# Altium PCB Cat_v1.PcbDoc (part 1 of 2)
Units mil, origin at the board's own origin, x right, y up, seen from the top; angles counter-clockwise.
Board outline 3347.94 x 3903.41 mil, 2 copper layers (Top, Bottom), stack 61.811 mil thick; 108 components, 71 nets, 321 pads, 652 vias.
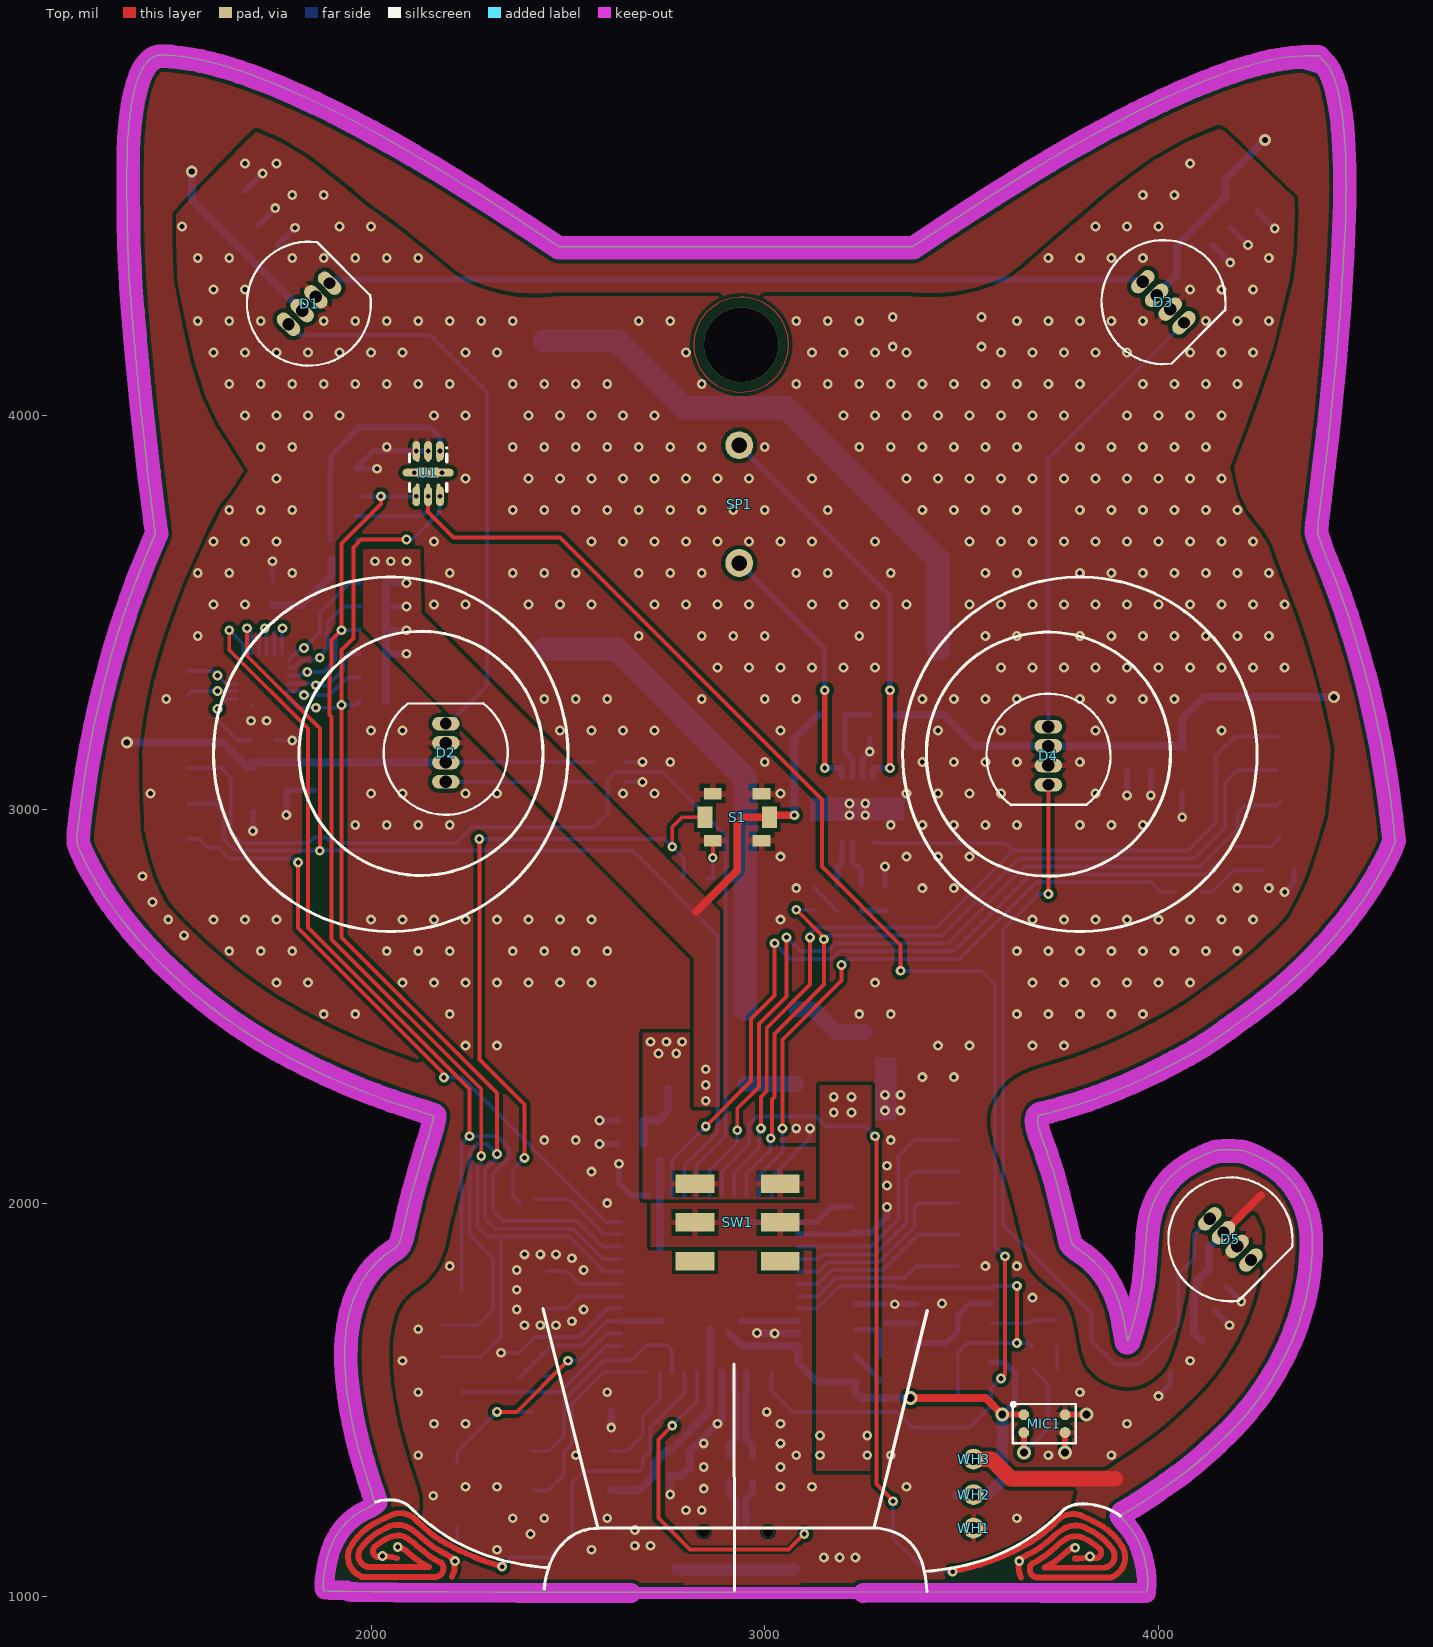
[diagram p0: Top view]
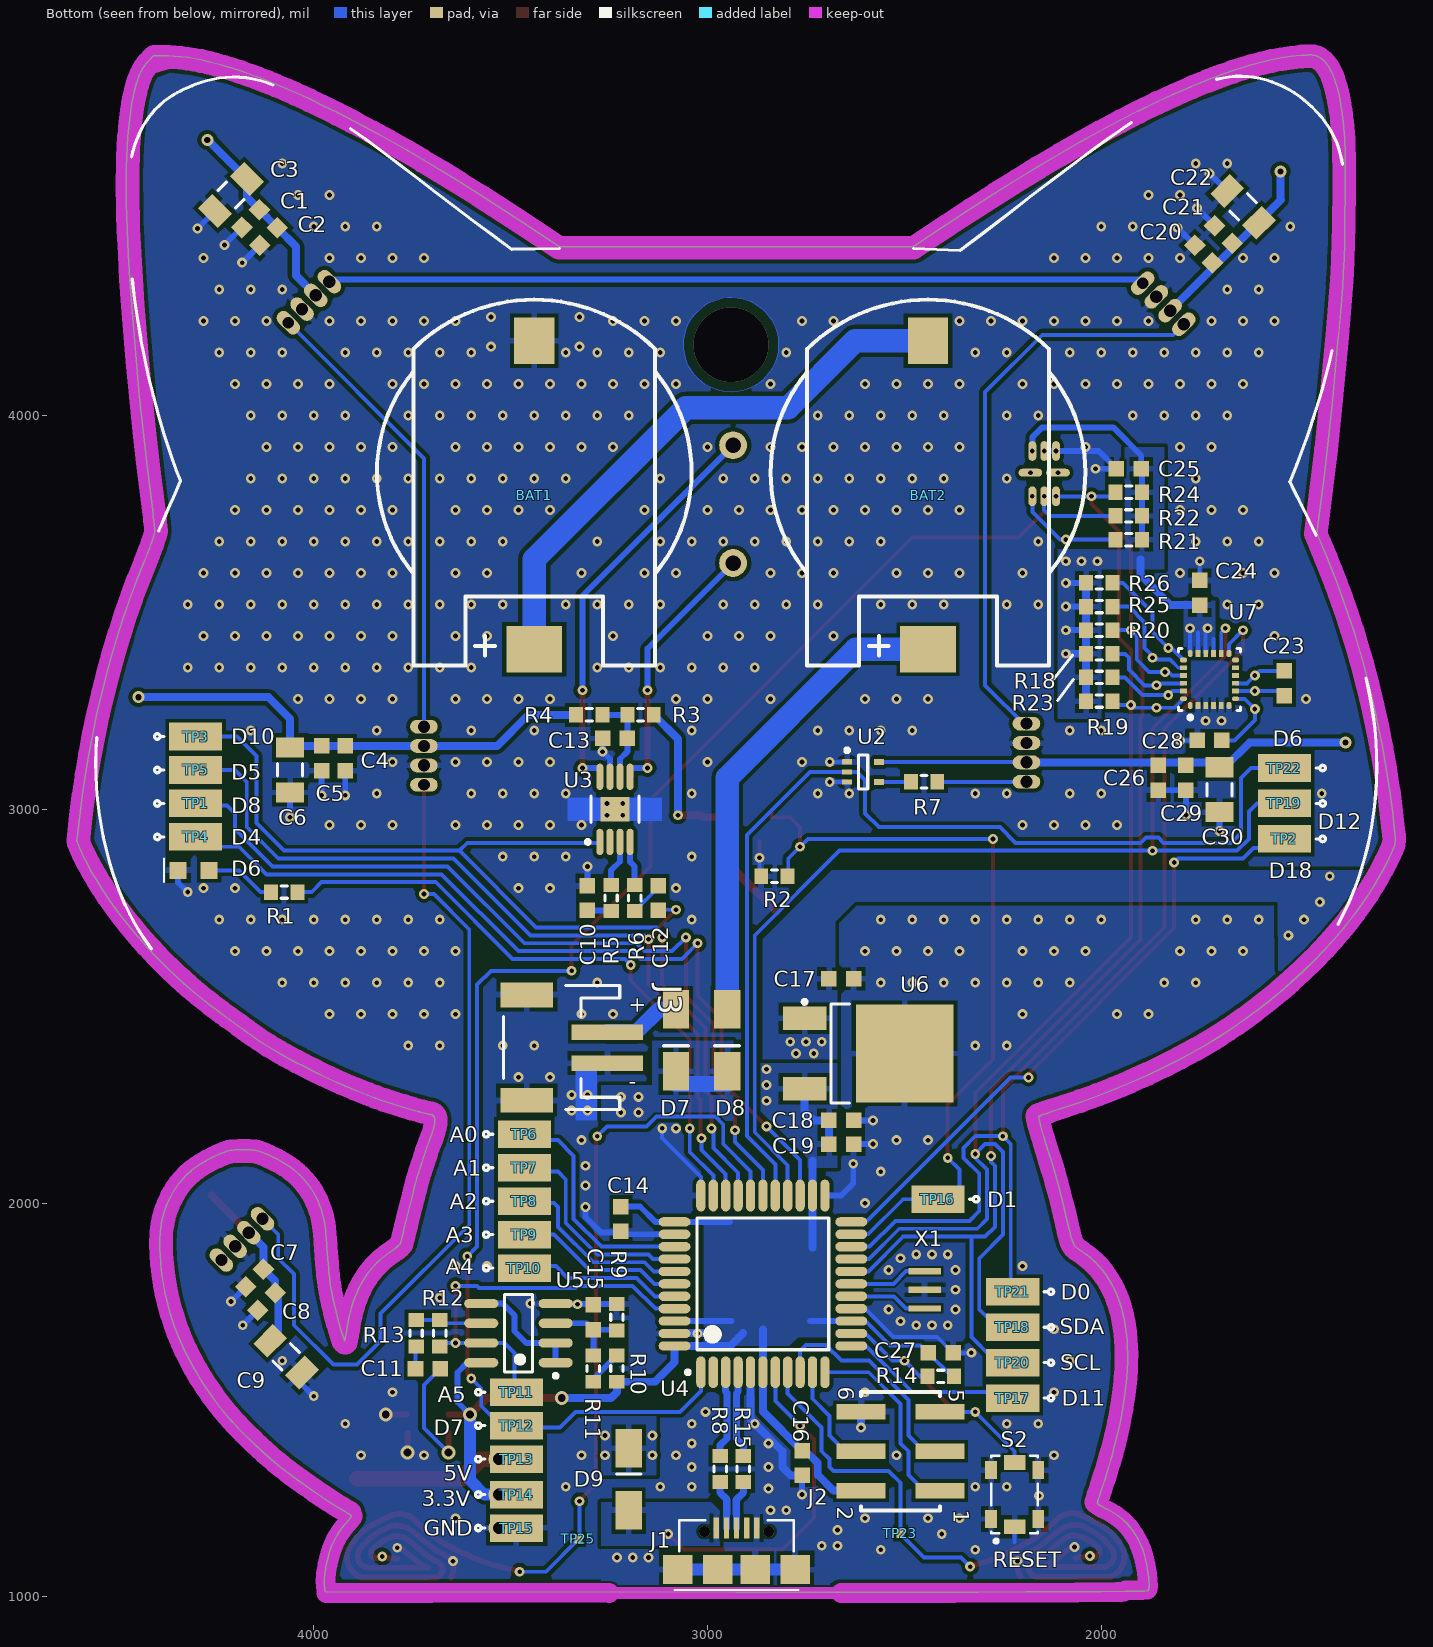
[diagram p1: Bottom view, seen from below]

## Layer stack, top to bottom
Top Solder: solder mask 0.4, Solder Resist, Dk 3.5
Top: signal copper 1.378
Dielectric 1: core 59.055, FR-4, Dk 4.8
Bottom: signal copper 1.378
Bottom Solder: solder mask 0.4, Solder Resist, Dk 3.5

## Board outline
1093 vertices, not listed, extent 1253.26,1012.32 4601.2,4915.73

## Design rules (kind name [scope] priority, off if disabled: settings)
AssemblyTestPointUsage SilkToBoardRegionClearance_1 [All] p1:
AssemblyTestPointUsage [All] p2:
AssemblyTestPointUsage SilkToBoardRegionClearance_2 [All] p3:
Clearance Clearance_Polygon [InNamedPolygon('GND_L02_P056') or InNamedPolygon('GND_L01_P034') or InNamedPolygon('VCC_L01_P036') or InNamedPolygon('VIN_L01_P010') or InNamedPolygon('VCC_L01_P014')] p1: gap=10
Clearance Clearance_Diff [InNet('D_N') vs InNet('D_P')] p2: gap=6
Clearance [All] p3: gap=6
DiffPairsRouting [InDifferentialPairClass('All Differential Pairs')] p1: maxlimit=10 minlimit=6 mostfreqgap=6 toplayer_minwidth=6 toplayer_maxwidth=20 toplayer_prefwidth=18 bottomlayer_minwidth=6 bottomlayer_maxwidth=20 bottomlayer_prefwidth=18 maxuncoupledlength=500
HoleSize [All] p1: absolutevalues=TRUE maxlimit=250 minlimit=11.81 maxpercent=80.000 minpercent=20.000
MatchedLengths DiffPair_DIFF100MatchedLengths [InDifferentialPairClass('DIFF100')] p1: tolerance=6 checknetsindiffpair=TRUE checkdiffpairvsdiffpair=FALSE checkxsignals=FALSE checkothers=FALSE
MinimumSolderMaskSliver [All] p1: minsoldermaskwidth=3.94
PolygonConnect PolygonConnect_Via [IsVia] p1: connectstyle=Direct reliefconductorwidth=10 reliefentries=4 polygonreliefangle="90 Angle" airgapwidth=10
PolygonConnect PolygonConnect_powerstuff [InNet('5V') OR InNet('3.3V') OR InNet('GND') OR InNet('VCC') OR InNet('VIN')] p2: connectstyle=Relief reliefconductorwidth=15 reliefentries=4 polygonreliefangle="90 Angle" airgapwidth=10
PolygonConnect [All] p3: connectstyle=Direct reliefconductorwidth=10 reliefentries=4 polygonreliefangle="90 Angle" airgapwidth=10
RoutingVias [All] p1: holewidth=12 width=25 viastyle="Through Hole" minholewidth=12 minwidth=25 maxholewidth=28 maxwidth=50
SilkToSolderMaskClearance [IsPad] p1 off: minsilkscreentomaskgap=10 clearancetoexposedcopper=TRUE
SolderMaskExpansion [All] p1: expansion=4
Width [All] p1: maxlimit=100 minlimit=6 preferedwidth=10
25 further rules are at their usual default settings.

## Classes and differential pairs
differential pair D: +D_P -D_N
differential pair IND: +IND_P -IND_N

## Components (designator, comment, footprint, x,y, rotation, side; value= is the part's Value field where it differs from the comment)
BAT1 "BAT/Standard" BAT/S8421-45R 3440,4190 r180 bottom
BAT2 "BAT/Standard" BAT/S8421-45R 2440,4190 r180 bottom
C1 "Capacitor" CAPC_MET_1608N 4160,4500 r315 bottom
C2 "Capacitor" CAPC_MET_1608N 4115,4455 r315 bottom
C3 "Capacitor" CAPC_MET_3216N 4210,4560 r315 bottom
C4 "Capacitor" CAPC_MET_1608N 3920,3130 r270 bottom
C5 "Capacitor" CAPC_MET_1608N 3980,3130 r270 bottom
C6 "Capacitor" CAPC_MET_3216N 4060,3100 r270 bottom
C7 "Capacitor" CAPC_MET_1608N 4150,1810 r315 bottom
C8 "Capacitor" CAPC_MET_1608N 4120,1750 r315 bottom
C9 "Capacitor" CAPC_MET_3216N 4070,1610 r225 bottom
C10 "Capacitor" CAPC_MET_1608N 3305,2775 r270 bottom
C11 "Capacitor" CAPC_MET_1608N 3710,1580 r0 bottom
C12 "Capacitor" CAPC_MET_1608N 3125,2775 r90 bottom
C13 "Capacitor" CAPC_MET_1608N 3235,3180 r180 bottom
C14 "Capacitor" CAPC_MET_1608N 3220,1960 r90 bottom
C15 "Capacitor" CAPC_MET_1608N 3290,1710 r270 bottom
C16 "Capacitor" CAPC_MET_1608N 2760,1340 r90 bottom
C17 "Capacitor" CAPC_MET_1608N 2660,2570 r180 bottom
C18 "Capacitor" CAPC_MET_1608N 2660,2210 r0 bottom
C19 "Capacitor" CAPC_MET_1608N 2660,2150 r0 bottom
C20 "Capacitor" CAPC_MET_1608N 1740,4410 r45 bottom
C21 "Capacitor" CAPC_MET_1608N 1690,4460 r45 bottom
C22 "Capacitor" CAPC_MET_3216N 1640,4530 r45 bottom
C23 "Capacitor" CAPC_MET_1608N 1535,3320 r90 bottom
C24 "Capacitor" CAPC_MET_1608N 1750,3550 r270 bottom
C25 "Capacitor" CAPC_MET_1608N 1930,3865 r180 bottom
C26 "Capacitor" CAPC_MET_1608N 1855,3080 r270 bottom
C27 "Capacitor" CAPC_MET_1608N 2408,1620 r0 bottom
C28 "Capacitor" CAPC_MET_1608N 1725,3175 r180 bottom
C29 "Capacitor" CAPC_MET_1608N 1785,3080 r270 bottom
C30 "Capacitor" CAPC_MET_3216N 1700,3050 r270 bottom
D1 "DIO/APA106" DIO8MM_4PIN 1790.45,4231.8 r45 top
D2 "DIO/APA106" DIO8MM_4PIN 2190,3070 r90 top
D3 "DIO/APA106" DIO8MM_4PIN 3960,4340 r315 top
D4 "DIO/APA106" DIO8MM_4PIN 3720,3210 r270 top
D5 "DIO/APA106" DIO8MM_4PIN 4130,1960 r315 top
D6 "LED" "LED 0603" 4305,2845 r0 bottom
D7 "DIO/Schottky" SMA/DO-214AC_wide 3080,2492.26 r270 bottom
D8 "DIO/Schottky" SMA/DO-214AC_wide 2950,2492.26 r270 bottom
D9 "DIO/Schottky" SMA/DO-214AC_wide 3200,1220 r90 bottom
J1 "USB_miniB" 629105136821 2926.3,1175 r180 bottom
J2 "Header 3X2" M20-8760342 2410,1270 r90 bottom
J3 "S2B-PH-SM4-TB" S2B-PH-SM4-TB 3255,2395 r270 bottom
MIC1 "SPQ1410HR5H-B" SPQ1410HR5H-B 3710,1440 r90 top
R1 "Resistor" RESC_MET_1608N 4075,2790 r180 bottom
R2 "Resistor" RESC_MET_1608N 2830,2830 r180 bottom
R3 "Resistor" RESC_MET_1608N 3170,3240 r0 bottom
R4 "Resistor" RESC_MET_1608N 3300,3240 r180 bottom
R5 "Resistor" RESC_MET_1608N 3245,2775 r90 bottom
R6 "Resistor" RESC_MET_1608N 3185,2775 r90 bottom
R7 "Resistor" RESC_MET_1608N 2450,3070 r180 bottom
R8 "Resistor" RESC_MET_1608N 2968,1325 r90 bottom
R9 "Resistor" RESC_MET_1608N 3230,1710 r270 bottom
R10 "Resistor" RESC_MET_1608N 3230,1580 r90 bottom
R11 "Resistor" RESC_MET_1608N 3290,1580 r270 bottom
R12 "Resistor" RESC_MET_1608N 3680,1670 r270 bottom
R13 "Resistor" RESC_MET_1608N 3740,1670 r90 bottom
R14 "Resistor" RESC_MET_1608N 2408,1560 r180 bottom
R15 "Resistor" RESC_MET_1608N 2909,1325 r90 bottom
R18 "Resistor" RESC_MET_1608N 2005,3395 r0 bottom
R19 "Resistor" RESC_MET_1608N 2005,3275 r0 bottom
R20 "Resistor" RESC_MET_1608N 2005,3455 r0 bottom
R21 "Resistor" RESC_MET_1608N 1930,3685 r180 bottom
R22 "Resistor" RESC_MET_1608N 1930,3745 r180 bottom
R23 "Resistor" RESC_MET_1608N 2005,3335 r0 bottom
R24 "Resistor" RESC_MET_1608N 1930,3805 r180 bottom
R25 "Resistor" RESC_MET_1608N 2005,3515 r0 bottom
R26 "Resistor" RESC_MET_1608N 2005,3575 r0 bottom
S1 "" PTS820_noPegs 2930,2980 r0 top
S2 "RESET" PTS820_noPegs 2220,1260 r90 bottom
SP1 "Speaker" SPEAKER/15MM 2935,3775 r270 top
SW1 "JS202011SCQN" JS202011SCQN 2931,1951 r90 top locked
TP1 "D8" TP/SMT135x70/HOOK 4300,3015 r180 bottom
TP2 "D18" TP/SMT135x70/HOOK 1535,2925 r0 bottom
TP3 "D10" TP/SMT135x70/HOOK 4300,3185 r180 bottom
TP4 "D4" TP/SMT135x70/HOOK 4300,2930 r180 bottom
TP5 "D5" TP/SMT135x70/HOOK 4300,3100 r180 bottom
TP6 "A0" TP/SMT135x70/HOOK 3465,2175 r180 bottom
TP7 "A1" TP/SMT135x70/HOOK 3465,2090 r180 bottom
TP8 "A2" TP/SMT135x70/HOOK 3465,2005 r180 bottom
TP9 "A3" TP/SMT135x70/HOOK 3465,1920 r180 bottom
TP10 "A4" TP/SMT135x70/HOOK 3465,1835 r180 bottom
TP11 "A5" TP/SMT135x70/HOOK 3485,1520 r180 bottom
TP12 "D7" TP/SMT135x70/HOOK 3485,1435 r180 bottom
TP13 "5V" TP/SMT135x70/HOOK 3485,1350 r180 bottom
TP14 "3.3V" TP/SMT135x70/HOOK 3485,1260 r180 bottom
TP15 "GND" TP/SMT135x70/HOOK 3485,1175 r180 bottom
TP16 "D1" TP/SMT135x70/HOOK 2415,2010 r0 bottom
TP17 "D11" TP/SMT135x70/HOOK 2225,1505 r0 bottom
TP18 "SDA" TP/SMT135x70/HOOK 2225,1685 r0 bottom
TP19 "D12" TP/SMT135x70/HOOK 1535,3015 r0 bottom
TP20 "SCL" TP/SMT135x70/HOOK 2225,1595 r0 bottom
TP21 "D0" TP/SMT135x70/HOOK 2225,1775 r0 bottom
TP22 "D6" TP/SMT135x70/HOOK 1535,3105 r0 bottom
TP23 "TP/Standard" TP/SMT20X24 2510,1162 r180 bottom
TP25 "TP/Standard" TP/SMT20X24 3328,1148 r180 bottom
U1 "OPT3001" SON65P200X65_HS-7N 2145,3855 r270 top
U2 "SN74LV1T125DCKR" DCK0005A_L 2605,3095 r180 bottom
U3 "TPA2005D1DGNRG4" TI-DGN8-1760X1425TP_N 3235,3000 r90 bottom
U4 "ATmega32U4-AU" 44ML_M 2859.3,1795 r90 bottom locked
U5 "LMV358MX" M08A_N 3480,1670 r0 bottom
U6 "LDF33DT-TR" DPAK228P972X240-3N 2590,2380 r180 bottom
U7 "LSM9DS0" STM-LGA-24_V 1725,3330 r90 bottom
WH1 "WIRE_HOLE" "24AWG HOLE" 3530,1175 r90 top
WH2 "WIRE_HOLE" "24AWG HOLE" 3530,1260 r90 top
WH3 "WIRE_HOLE" "24AWG HOLE" 3530,1350 r0 top
X1 "CSTCE_G" CSTCE_G 2448,1780 r90 bottom

## Footprints (in the part's own frame and the unit in brackets; to place one, negate y for a bottom-side part, rotate by r counter-clockwise, add the part's x,y. Pads: shape width x height; smd on the part's side, far side on the other; paste and mask are expansions set on the pad)
"24AWG HOLE" [mm] "Wire Via"
  round 1.33 hole 0.76: 1(0,0)
44ML_M [mm] "Thin QFP, 44-Leads, Body 10x10mm, Pitch 0.8mm, IPC Low Density"
  oval 2.05x0.6 smd: 1(-5.7,4) 2(-5.7,3.2) 3(-5.7,2.4) 4(-5.7,1.6) 5(-5.7,0.8) 6(-5.7,0) 7(-5.7,-0.8) 8(-5.7,-1.6) 9(-5.7,-2.4) 10(-5.7,-3.2) 11(-5.7,-4) 23(5.7,-4) 24(5.7,-3.2) 25(5.7,-2.4) 26(5.7,-1.6) 27(5.7,-0.8) 28(5.7,0) 29(5.7,0.8) 30(5.7,1.6) 31(5.7,2.4) 32(5.7,3.2) 33(5.7,4)
  oval 0.6x2.05 smd: 12(-4,-5.7) 13(-3.2,-5.7) 14(-2.4,-5.7) 15(-1.6,-5.7) 16(-0.8,-5.7) 17(0,-5.7) 18(0.8,-5.7) 19(1.6,-5.7) 20(2.4,-5.7) 21(3.2,-5.7) 22(4,-5.7) 34(4,5.7) 35(3.2,5.7) 36(2.4,5.7) 37(1.6,5.7) 38(0.8,5.7) 39(0,5.7) 40(-0.8,5.7) 41(-1.6,5.7) 42(-2.4,5.7) 43(-3.2,5.7) 44(-4,5.7)
  silkscreen extent -5.82,-4.25 4.25,4.98, body extent -5,-5 5,5, height 1.2
629105136821 [mm]
  rect 0.343x1.35 smd: 1(-1.3,0) 2(-0.65,0) 3(0,0) 4(0.65,0) 5(1.3,0)
  rect 1.9x1.9 smd: 6(-3.8,-2.675) 7(-1.2,-2.675) 8(1.2,-2.675) 9(3.8,-2.675)
  silkscreen extent -4,-4 4,0.5
BAT/S8421-45R [mm] "CR2032 Holder"
  rect 3.6x3 smd: 1(0,-19.9)
  rect 2.6x3 smd: 2(0,0)
  silkscreen extent -10.15,-20.95 10.15,2.65, body extent -10,-20.95 10,2.67, height 5.4
CAPC_MET_1608N [mm] "Chip Capacitor, Body 1.6x0.8mm, IPC Medium Density"
  rect 1x1 smd: 1(-0.8,0) 2(0.8,0)
  body extent -0.87,-0.47 0.87,0.47, height 0.85
CAPC_MET_3216N [mm] "Chip Capacitor, Body 3.2x1.6mm, IPC Medium Density"
  rect 1.3x1.8 smd: 1(-1.45,0) 2(1.45,0)
  silkscreen extent -0.4,-0.8 0.4,0.8, body extent -1.7,-0.9 1.7,0.9, height 1.35
CSTCE_G [mm]
  rect 0.4x2.1 smd: 1(-1.2,0) 2(0,0) 3(1.2,0)
  body extent -1.6,-0.7 1.6,0.7, height 0.7
DCK0005A_L [mm] "SOT23, 5-Leads, Body 2.15x1.4mm, Pitch 0.65mm, IPC High Density"
  rrect25% 0.65x0.343 smd: 1(-1.025,0.65) 2(-1.025,0) 3(-1.025,-0.65)
  rrect25% 0.65x0.4 smd: 4(1.025,-0.65) 5(1.025,0.65)
  silkscreen extent -1.15,-1.1 0.3,1.52, body extent -1.14,-1 1.14,1, height 0.94
DIO8MM_4PIN [mil]
  oval 35x70 hole 31.5: 1(0,0) 2(49.21,0) 3(98.43,0)
  oval 35x70 hole 30: 4(147.64,0)
  silkscreen extent -84,-157 199,158, body extent -100,-173 247,173, height 394
DPAK228P972X240-3N [mm] "D-PAK, 3-Pads, Body 6.40x6.56mm (max), IPC Medium Density"
  rect 2.8x1.5 smd: 1(-4.15,2.28) 3(-4.15,-2.28)
  rect 6.3x6.3 smd: 4(2.3,0)
  silkscreen extent -4.28,-3.2 -1.25,3.45, body extent -4.22,-3.2 5.5,3.2, height 2.4
JS202011SCQN [mm]
  rect 1.2x2.5 smd: 1(-2.5,-2.75)
  rect 1.194x2.502 smd: 2(0,-2.75) 3(2.5,-2.75) 4(-2.5,2.75) 5(0,2.75) 6(2.5,2.75)
  body extent -4.5,-2 4.5,2, height 5.5
"LED 0603" [mm]
  rect 1.1x1.1 smd: A(-1,0) K(1,0)
  silkscreen extent 1.91,-0.76 1.91,0.76, body extent -0.84,-0.8 0.84,0.35, height 0.6
M08A_N [mm] "SOIC, 8-Leads, Body 4.9x3.9mm, Pitch 1.27mm, IPC Medium Density"
  oval 2.2x0.6 smd: 1(-2.4,1.905) 2(-2.4,0.635) 3(-2.4,-0.635) 4(-2.4,-1.905) 5(2.4,-1.905) 6(2.4,-0.635) 7(2.4,0.635) 8(2.4,1.905)
  silkscreen extent -2.52,-2.5 0.9,2.88, body extent -2,-2.5 2,2.5, height 1.75
M20-8760342 [mm] "HEADER SMT 2X3"
  rect 1x3.15 smd: 1(0,0) 2(0,5.08) 3(2.54,0) 4(2.54,5.08) 5(5.08,0) 6(5.08,5.08)
  silkscreen extent -1.27,0 6.35,5.08, body extent -1.27,-1.14 6.35,6.22, height 9.65
PTS820_noPegs [mm]
  rect 0.95x1.4 smd: 1(-2.075,0) 2(2.075,0)
  rect 1.15x0.75 smd: MH(-1.575,-1.525) MH(-1.575,1.525) MH(1.575,-1.525) MH(1.575,1.525)
  body extent -2,-1.5 2,1.5, height 2.5
RESC_MET_1608N [mm] "Chip Resistor, Body 1.6x0.8mm, IPC Medium Density"
  rect 0.9x1 smd: 1(-0.85,0) 2(0.85,0)
  silkscreen extent -0.2,-0.4 0.2,0.4, body extent -0.85,-0.48 0.85,0.48, height 0.6
S2B-PH-SM4-TB [mm]
  rect 1x4.6 smd: 1(1,0.017) 2(-1,0.017)
  rect 1.6x3.4 smd: MT1(-3.4,-5.183) MT2(3.4,-5.183)
  silkscreen extent -4,-6.68 4,0.82, body extent -3.99,-6.68 4.01,0.81, height 5.5
SMA/DO-214AC_wide [mm] "DO-214-AC/SMA; DC version"
  rect 2.5x1.7 smd: A(0,0) K(4,0)
  silkscreen extent 2.35,-0.8 2.35,0.8, body extent -0.25,-1.5 4.25,1.5, height 2.3
SON65P200X65_HS-7N [mm] "SON, 6-Leads, Body 2.00x2.00mm, Pitch 0.65mm, Thermal Pad 1.35x0.65mm, IPC Medium Density"
  oval 0.5x0.25 smd: 1(-0.95,0.675) 2(-0.95,0) 3(-0.95,-0.675) 4(0.95,-0.675) 5(0.95,0) 6(0.95,0.675)
  rect 0.65x1.35 smd: 7(0,0)
  silkscreen extent -1.65,-1.2 1.2,1.25, body extent -1.15,-1.05 1.15,1.05, height 0.65
SPEAKER/15MM [mm]
  round 1.8 hole 1: 1(-3.8,0) 2(3.8,0)
  body extent -7.5,-7.5 7.5,8.5, height 7.6
SPQ1410HR5H-B [mm]
  round 0.7 smd: 1(0.575,1.33) 2(0.575,-1.33) 3(-0.575,-1.33) 4(-0.575,1.33)
  silkscreen extent -1.27,-2.03 1.27,2.03, body extent -1.14,-1.91 1.14,1.91, height 1.1
STM-LGA-24_V [mm] "LGA, 24-Leads, Body 4x4mm, Pitch 0.5mm"
  oct 0.45x0.3 smd mask+0.05: 1(-1.675,1.25) 6(-1.675,-1.25) 13(1.675,-1.25) 18(1.675,1.25)
  rect 0.45x0.3 smd mask+0.05: 2(-1.675,0.75) 3(-1.675,0.25) 4(-1.675,-0.25) 5(-1.675,-0.75) 14(1.675,-0.75) 15(1.675,-0.25) 16(1.675,0.25) 17(1.675,0.75)
  oct 0.3x0.45 smd mask+0.05: 7(-1.25,-1.675) 12(1.25,-1.675) 19(1.25,1.675) 24(-1.25,1.675)
  rect 0.3x0.45 smd mask+0.05: 8(-0.75,-1.675) 9(-0.25,-1.675) 10(0.25,-1.675) 11(0.75,-1.675) 20(0.75,1.675) 21(0.25,1.675) 22(-0.25,1.675) 23(-0.75,1.675)
  silkscreen extent -2.57,-2 2,2, body extent -2,-2 2,2, height 1.07
TI-DGN8-1760X1425TP_N [mm] "SOP, 8-Leads, Body 3.1x3.1mm, Pitch 0.65mm, Thermal Pad 1.89x1.57mm, IPC Medium Density"
  oval 1.7x0.45 smd: 1(-2.1,0.975) 2(-2.1,0.325) 3(-2.1,-0.325) 4(-2.1,-0.975) 5(2.1,-0.975) 6(2.1,-0.325) 7(2.1,0.325) 8(2.1,0.975)
  rect 1.57x1.89 smd: 9(0,0)
  silkscreen extent -2.22,-1.55 0.85,1.88, body extent -1.55,-1.55 1.55,1.55, height 1.1
TP/SMT20X24 [mil]
  rect 20x24 smd paste-50: 1(0,0)
TP/SMT135x70/HOOK [mil] "SMT Test Point - 135mil x 70mil With Hook"
  rect 135x70 smd: 1(0,0)
  silkscreen extent -104,-7 -80,7, body extent -53,-20 53,20, height 60

## Part data
BAT1 BAT2: library part S8421-45R, "HOLDER BATT COIN CR2032/20MM"
C1 C4 C7 C11 C14 C19 C20 C25 C26 C27: library part GRM188R71C104KA01D, "CAP CER 0.1UF 16V X7R 0603"
C2 C5 C8 C17 C18 C21 C29: library part CL10B475KQ8NQNC, "CAP CER 4.7UF 6.3V X7R 0603"
C3 C6 C9 C22 C30: library part GRM31CR60J476ME19L, "CAP CER 47UF 6.3V 20% X5R 1206"
C10 C12: library part CL10B332KB8NNNC, "CAP CER 3300PF 50V X7R 0603"
C13 C15 C16: library part C1608X7R1C105M, "CAP CER 0603 16V X7R 20%"
C23: library part C1608X7R1C224K080AC, "CAP CER 0.22UF 16V X7R 0603"
C24 C28: library part GRM188R61C106MA73D, "CAP CER 10UF 16V 20% X5R 0603"
D1 D2 D3 D4 D5: library part APA106-F8-8, "LED RGB DIFF 8MM ROUND T/H"
D6: library part LTST-S270KRKT, "LED RED CLEAR 0603 R/A SMD"
D7 D8 D9: library part B340A-13-F, "DIODE SCHOTTKY 40V 3A SMA"
J1: library part 629105136821, "USB Micro B"
J2: library part M20-8760342, "2X3POS DIL VERTICAL SMT HEADER"
J3: "2 Positions Header, Shrouded Connector 0.079\" (2.00mm) Surface Mount, Right Angle Tin"
MIC1: "MIC MEMS ANALOG OMNI -42DB"
R1: library part ERJ-1GEJ331C, "RES SMD 330 OHM 5% 1/20W 0201"
R2 R9 R10 R11 R14 R18 R19 R20 R21 R22 R23 R24 R25 R26: library part ERJ-3EKF1002V, "RES 0603 10K 1% 0.1W"
R3 R4: library part ERJ-3GEY0R00V, "RES 0603 ZERO 0.1W"
R5 R6: library part ERJ-3EKF1503V, "RES 0603 150K 1% 0.1W"
R7: library part RC0603FR-07470RL, "RES SMD 470 OHM 1% 1/10W 0603"
R8 R15: library part RC0603JR-0722RL, "RES SMD 22 OHM 5% 1/10W 0603"
R12: library part ERJ-3EKF1003V, "RES 0603 100K 1% 0.1W"
R13: library part ERJ-3EKF1001V, "RES 0603 1K 1% 0.1W"
S1 S2: library part "PTS820 J20M SMTR LFS", "SWITCH TACTILE SPST-NO 0.05A 12V"
SP1: library part CVS-1508, "SPEAKER 8 OHM .3W 15MM ROUND"
SW1: "SWITCH SLIDE DPDT 300MA 6V"
TP1 TP2 TP3 TP4 TP5 TP6 TP7 TP8 TP9 TP10 TP11 TP12 TP13 TP14 TP15 TP16 TP17 TP18 TP19 TP20 TP21 TP22: library part 5015, "SMT Test Point - 135mil x 70mil With Hook"
TP23 TP25: library part "SMT Test Point 20x24mil Square", "SMT Test Point 20x24mil Square"
U1: library part OPT3001DNPT, "IC AMBIENT LIGHT SENSOR 6USON"
U2: library part CMP-0859-00356-3, "Single Power Supply, Single BUFFER GATE w/ 3-State Output (active low enable), DCK0005A, LARGE T&R"
U3: library part CMP-0991-00100-1, "1.4-W Mono Class-D Audio Amplifier, -40 to 85 degC, 8-pin SOP (DGN8), Green (RoHS & no Sb/Br)"
U4: library part CMP-0095-00285-2, "8-bit AVR Microcontroller, 2.7-5.5V, 16MHz, 32KB Flash, 1KB EEPROM, 2.5KB SRAM, USB Controller, 44-pin TQFP, Industrial Grade (-40°C to 85°C), Ext Osc"
U5: library part CMP-0055-00557-2, "General Purpose, Low Voltage, Rail-to-Rail Output Operational Amplifiers, 8-pin Narrow SOIC"
U6: "IC REG LDO 3.3V 1A DPAK"
U7: library part CMP-1273-00001-1, "INEMO Inertial Module: 3D Accelerometer, 3D Gyroscope, 3D Magnetometer, 2.4 to 3.6 V, -40 to 85 degC, 24-Pin LGA, RoHS, Tray"
WH1 WH2 WH3: library part "Wire Hole 24AWG", "Via for 24AWG wire"
X1: library part CSTCE8M00G55-R0, "CER RES 8.0000MHZ 33PF SMD"

## Free pads (board coordinates)
  oval 20x50 hole 12 mask+3: 1(2115,3795) 1(2115,3910) 1(2145,3795) 1(2145,3910) 1(2175,3795) 1(2175,3910)
  oval 60x20 hole 12: 4(2180,3855) 5(2110,3855)

## Via types
v1: diameter 25, hole 12, Top to Bottom, tented both sides, 618 vias
v2: diameter 25, hole 12, Top to Bottom, tented top, 22 vias
v3: diameter 30, hole 16, Top to Bottom, tented both sides, 4 vias
v4: diameter 35, hole 20, Top to Bottom, tented top, 4 vias
v5: diameter 27.56, hole 27.56, Top to Bottom, tented both sides, 2 vias
v6: diameter 35, hole 20, Top to Bottom, tented both sides, 1 vias
v7: diameter 190, hole 190, Top to Bottom, 1 vias

## Nets (pads, with @x,y where several pads share a name; then routed paths per layer and width w, separated by ;. In a path a pad name is that pad's centre, name@x,y a point inside that pad or via, vN(x,y) a via of type N, cw(c..) or ccw(c..) an arc to the next point about the centre after c; other vN are vias at no path point)
3.3V: C14.2 C16.2 C18.2 C19.2 C24.2 C25.2 C27.2 J2.2 MIC1.1 pad.1@2175,3910 R3.1 R10.1 R14.2 R18.2 R19.2 R20.2 R21.2 R22.2 R23.2 R24.2 R25.2 R26.2 S1.2 TP14.1 U1.1 U4.6 U4.14 U4.24 U4.34 U4.42 U4.44 U5.8 U6.3 U7.15 U7.16 U7.17 U7.18 WH2.1 | length 5378.1
  Top w15: v4(3603,1463) MIC1.1@3657.28,1463
  Top w20: 2825,2740 2930,2845 2930,2965 2945,2980 S1.2@3011.69,2980 3016.69,2985 v1(3075,2985) ; v6(3370,1505) 3561,1505 v4(3603,1463)
  Bottom w10: U7.15@1715.16,3395.94 1715.16,3432.16 ; U7.16@1734.84,3395.94 v2@1734.84,3449.84 ; U7.17@1754.53,3395.94 1754.53,3449.53 ; U7.18@1774.21,3395.94 v2@1774.21,3449.21 ; R14.2@2374.54,1560 2379.5,1560 C27.2@2439.5,1620 2458.5,1639 2537,1639 2598.51,1700.51 U4.14@2634.89,1700.51
  Bottom w15: R21.2@1896.54,3685 R22.2@1896.54,3745 R24.2@1896.54,3805 C25.2@1896.54,3863.03 ; C25.2@1898.5,3865 1898.5,3898.5 1970,3970 2150,3970 2175,3945 pad.1@2175,3910 ; R20.2@2038.46,3455 v1(2090,3455) ; R25.2@2038.46,3515 v1(2090,3515) ; R26.2@2038.46,3575 v1(2090,3575) ; U4.14@2634.89,1700.51 2739.49,1700.51 ; 2939.49,1700.51 U4.42@3083.71,1700.51 ; 2942.48,1952.48 U4.34@3083.71,1952.48 3132.48,1952.48 3171.5,1991.5 C14.2@3220,1991.5 ; U5.8@3574.49,1595 3610,1595 3635,1570 3635,1495 v4(3603,1463)
  Bottom w20: C24.2@1750,3518.5 1823.5,3518.5 1900,3595 1900,3635 ; R19.2@2038.46,3275 R18.2@2038.46,3395 ; R26.2@2038.46,3575 R25.2@2038.46,3515 R20.2@2038.46,3455 R18.2@2038.46,3395 ; v1(2090,3395) R18.2@2038.46,3395 ; J2.2@2610,1270 2680,1270 2720,1310 2720,1340 2751.5,1371.5 C16.2@2760,1371.5 2859.3,1470.8 U4.6@2859.3,1570.59 2859.3,1679.3 ; C19.2@2691.5,2150 C18.2@2691.5,2210 2730,2210 2753.39,2233.39 U6.3@2753.39,2290.24 ; 2733.31,1886.69 U4.24@2733.31,2019.41 2733.31,2108.18 ; 2910,1670 2942.48,1637.52 U4.44@3083.71,1637.52 3083.71,1596.29 3133.46,1546.54 R10.1@3230,1546.54 3230,1520 3245,1505 v6(3370,1505) ; v1(3075,2985) 3075,3178.46 R3.1@3136.54,3240
  Bottom w30: TP14.1@3490,1260 3566.58,1260 3603,1296.42 v4(3603,1463)
  other v1: 2850,2260 2850,2300 2850,2340 2010,3630 2050,3630 2090,3630
  other v2: 1730,3460 1775,3460
3V3/2: U5.1 U5.2 U5.5 | length 303.8
  Bottom w15: U5.1@3385.51,1595 U5.2@3385.51,1645 3460,1645 3490,1675 3490,1715 3520,1745 U5.5@3574.49,1745
5V: D9.A J1.1 U4.7 | length 834.4
  Top w10: v1(2765,1435) 2730,1400 2730,1200 2810,1120 3060,1120 v1(3100,1160)
  Bottom w10: v1(2765,1435) 2827.8,1497.8 U4.7@2827.8,1570.59 ; J1.1@2977.48,1175 J1.1@2980,1172.48
A0: TP6.1 U4.36 | length 612.1
  Bottom w10: U4.36@3083.71,1889.49 3269.49,1889.49 3340,1960 3340,2120 3380,2160 TP6.1@3490,2160
A1: TP7.1 U4.37 | length 562.7
  Bottom w10: U4.37@3083.71,1857.99 3137.99,1857.99 3150,1870 3280,1870 3360,1950 3360,2060 3380,2080 TP7.1@3490,2080
A2: TP8.1 U4.38 | length 507.4
  Bottom w10: U4.38@3083.71,1826.5 3136.5,1826.5 3160,1850 3290,1850 3380,1940 3380,1990 3390,2000 TP8.1@3490,2000
A3: TP9.1 U4.39 | length 513.1
  Bottom w10: U4.39@3083.71,1795 3135,1795 3170,1830 3300,1830 3390,1920 TP9.1@3410,1920 ; TP9.1@3465,1920 TP9.1@3410,1920 ; TP9.1@3490,1920 TP9.1@3410,1920
A4: TP10.1 U4.40 | length 438
  Bottom w10: U4.40@3083.71,1763.5 3133.5,1763.5 3180,1810 3355,1810 3385,1840 TP10.1@3490,1840
BUTTON: R2.2 S1.1 TP16.1 U4.21 | length 1988
  Top w10: v1(2275,2925) 2275,2365 2390,2250 v1(2390,2115) ; v1(2765,2905) 2765,2955 2790,2980 2837.09,2980 S1.1@2837.09,2991.22
  Bottom w10: v1(2275,2925) 2745,2925 v1(2765,2905) 2795,2875 2795,2833.46 R2.2@2786.54,2825 ; TP16.1@2380,2000 2360,2020 2360,2085 v1(2390,2115) ; TP16.1@2415,2010 2503,2010 2592.02,1920.98 U4.21@2634.89,1920.98
D4: TP4.1 U4.25 | length 2178.3
  Top w10: v1(2850,2195) 2965,2310 2965,2467.13 3025,2527.13 v1(3025,2660)
  Bottom w10: U4.25@2764.81,2019.41 2764.81,2109.81 v1(2850,2195) ; v1(3025,2660) 3065,2620 3170,2620 3190,2640 3480,2640 3675,2835 4120,2835 4190,2905 4285,2905 TP4.1@4310,2930
D8: TP1.1 U4.28 | length 2187
  Top w10: v1(2930,2185) 2930,2240 2985,2295 2985,2455 3055,2525 v1(3055,2675)
  Bottom w10: U4.28@2859.3,2019.41 2859.3,2084.3 2930,2155 v1(2930,2185) ; v1(3055,2675) 3090,2640 3160,2640 3180,2660 3465,2660 3660,2855 4105,2855 4200,2950 4200,2990 4220,3010 4300,3010 TP1.1@4310,3020
D9: TP25.1 U4.29 | length 2905.4
  Top w10: v1(3280,2170) 3283.5,2166.5 3283.5,1286.5 3325.29,1244.71 v1(3325.29,1243.16)
  Top w15: v1@3476.74,1065.55 ccw(c3386.46,1598.73) 3617.31,1109.71 ccw(c3503.82,1384.35) 3657.24,1129.85 ccw(c3545.02,1365.01) 3692.83,1150.43 ccw(c3333.21,1616.1) 3722.22,1174.68 ccw(c3269.05,1688.83) 3750.78,1201.34 cw(c3783.33,1149.73) 3801.87,1207.86 ; 3679.15,1085.57 ccw(c3693.93,1070.32) 3692.62,1049.12 3880.62,1049.12 ; 3679.67,1085.03 ccw(c3561.02,1317.01) 3708.83,1102.43 ccw(c3349.21,1568.1) 3738.22,1126.68 cw(c3828.17,1035.93) 3758.62,1143.12 cw(c3796.65,1094.88) 3776.36,1152.86 cw(c3788.21,1102.35) 3809.35,1149.73 cw(c3744.66,1008.33) 3847.49,1124.97 cw(c3840.33,1112.83) 3843.62,1099.12 cw(c3838.57,1118.13) v1(3826,1103) cw(c3796,1182.4) 3787,1098 ; 3801.69,1207.3 cw(c3660.33,865.3) 3838.35,1189.73 cw(c3773.66,1048.33) 3911.58,1120.14 cw(c3861.09,1100.61) 3880.62,1050.12
  Bottom w10: U4.29@2890.8,2019.41 2890.8,2080.8 2960,2150 2960,2200 2980,2220 3130,2220 3155,2195 3255,2195 v1(3280,2170) ; v1(3325.29,1243.16) 3325.29,1150.29 3324.5,1149.5 3410,1064 v1(3477,1064)
D11: TP17.1 U4.12 | length 453.6
  Bottom w10: TP17.1@2230,1520 2480,1520 2597.52,1637.52 U4.12@2634.89,1637.52
D17: TP23.1 U4.8 | length 1885.3
  Top w15: 1976,1051 2164,1051 ccw(c2162.69,1072.2) 2177.47,1087.44 ; 1976,1052 cw(c1995.53,1102.49) 1945.04,1122.02 cw(c2082.96,1050.21) 2018.26,1191.61 cw(c2196.29,867.18) 2054.93,1209.18 ; 2054.75,1209.74 cw(c2073.29,1151.61) 2105.84,1203.22 ccw(c2587.57,1690.71) 2134.4,1176.56 ccw(c2523.41,1617.98) 2163.79,1152.3 ccw(c2311.6,1366.89) 2199.38,1131.73 ccw(c2352.8,1386.23) 2239.31,1111.59 ccw(c2470.16,1600.61) v1@2333.13,1077.49 ; 2065.78,1098.19 ccw(c2020.13,928.47) v1(2029,1104) cw(c2020,1115) 2009,1106 cw(c2019.49,1116.36) 2009.13,1126.85 cw(c2111.96,1010.21) 2047.26,1151.61 cw(c2068.41,1104.23) 2080.26,1154.74 cw(c2059.97,1096.76) 2098,1145 cw(c2028.45,1037.81) 2118.4,1128.56 ccw(c2507.41,1569.98) 2147.79,1104.3 ccw(c2295.6,1318.89) 2176.95,1086.91
  Bottom w10: v1(2333,1077) 2356,1100 2450,1100 2510,1160 2510,1290 2540,1320 2680,1320 2690,1330 2690,1350 2710,1370 2710,1430 2796.31,1516.31 U4.8@2796.31,1570.59
D18: TP2.1 U4.22 | length 1605.8
  Top w10: v1(1815,2865) 1815,2698.23 2185,2328.23 v1(2185,2319.12)
  Bottom w10: TP2.1@1535,2925 1565,2925 1588.27,2901.73 1613.27,2901.73 1640,2875 1805,2875 v1(1815,2865) ; v1(2185,2319.12) 2230.88,2319.12 2597.52,1952.48 U4.22@2634.89,1952.48
D_N: R8.2 U4.3 | length 220.7
  Bottom w18: U4.3@2953.79,1570.59 2953.79,1521.24 2950.5,1517.95 2950.5,1402.68 2968,1385.18 R8.2@2968,1358.46
D_P: R15.2 U4.4 | length 221.1
  Bottom w18: R15.2@2909,1358.46 2909,1385.18 2926.5,1402.68 2926.5,1517.03 2922.29,1521.24 U4.4@2922.29,1570.59
GND: BAT1.2 C1.2 C2.2 C3.2 C4.2 C5.2 C6.2 C7.2 C8.2 C9.2 C10.1 C13.1 C14.1 C15.1 C16.1 C17.2 C18.1 C19.1 C20.2 C21.2 C22.2 C24.1 C25.1 C26.2 C27.1 C28.1 C29.2 C30.2 D1.3 D2.3 D3.3 D4.3 D5.3 D6.K J1.5 J1.6 J1.7 J1.8 J1.9 J2.6 J3.1 J3.MT1 J3.MT2 MIC1.2 MIC1.3 pad.1@2115,3910 pad.1@2145,3910 R2.1 R9.1 S1.MH S2.1 S2.MH TP15.1 U1.2 U1.3 U2.1 U2.3 U3.7 U3.9 U4.5 U4.15 U4.23 U4.33 U4.35 U4.43 U5.4 U6.4 U7.2 U7.3 U7.4 U7.5 U7.6 WH1.1 X1.2 | length 5929.5
  Top w10: v1(2867.99,2877.01) S1.MH@2867.99,2919.96
  Top w15: 1992.04,1076 2147,1076 cw(c2265.65,1307.98) 2117.84,1093.4 cw(c2477.46,1559.08) 2088.45,1117.65 ccw(c2060.25,1082.99) v1(2068,1127) ; 1992.04,1076.2 cw(c1998.34,1105.67) 1974.82,1124.5 cw(c2099.96,1032.21) 2035.26,1173.61 cw(c2213.29,849.18) 2047.49,1180.02 cw(c2066.97,1121.76) 2105,1170 cw(c2035.45,1062.81) 2125.4,1153.56 ccw(c2514.41,1594.98) 2154.79,1129.3 ccw(c2302.6,1343.89) 2190.38,1108.73 ccw(c2343.8,1363.23) v1@2215.1,1095.38 ; 2200,1103 cw(c2172.13,1074.37) 2204.92,1051.54 ; v1@3644.93,1095.16 ccw(c3512.82,1361.35) 3666.24,1106.85 ccw(c3554.02,1342.01) 3701.83,1127.43 ccw(c3342.21,1593.1) 3731.22,1151.68 cw(c3821.17,1060.93) 3751.62,1168.12 cw(c3789.65,1119.88) 3809.13,1178.14 cw(c3643.33,847.3) 3821.35,1171.73 cw(c3756.66,1030.33) 3881.8,1122.62 cw(c3858.28,1103.79) 3864.58,1074.32 ; v1(3646,1091) ccw(c3710.64,1077.4) 3651,1049 ; v4(3762,1367) MIC1.3@3762,1417 ; MIC1.2@3762.72,1463 v4(3817,1463) ; v1(3788,1125) ccw(c3788,1083.55) 3776.57,1123.39 ccw(c3858.12,1025.03) 3768.17,1115.77 cw(c3379.16,1557.2) 3738.78,1091.52 cw(c3590.97,1306.11) 3709.62,1074.12 3864.58,1074.12
  Bottom w1: 3060.42,4180 ccw(c2940,4180) 3060.42,4180
  Bottom w10: U7.5@1695,3263.58 U7.5@1695.47,3264.06 ; C24.1@1750,3581.5 v1(1750,3630) ; C28.1@1756.5,3175 v1(1800,3175) ; 2220,1140 S2.1@2220,1178.31 ; v1(2330,1620) C27.1@2376.5,1620 2416.5,1660 2528,1660 2600.01,1732.01 U4.15@2634.89,1732.01 ; U2.3@2645.35,3069.41 v1(2689.41,3069.41) ; U2.1@2645.35,3120.59 v1(2689.41,3120.59) ; R2.1@2853.46,2825 2867.99,2825 v1(2867.99,2877.01) ; U4.33@3016.78,2019.41 3016.78,2066.78 3115,2165 v1(3115,2190)
  Bottom w15: C22.2@1680.37,4570.37 v1(1724.85,4614.85) ; v1(1700,2945) C30.2@1700,2992.91 ; C21.2@1712.27,4482.27 v1(1756.76,4526.76) ; C20.2@1762.27,4432.27 v1(1806.76,4476.76) ; v1(1785,2985.59) C29.2@1785,3048.5 C26.2@1855,3048.5 ; v1(2015,3865) C25.1@1961.5,3865 2006.5,3910 pad.1@2115,3910 pad.1@2145,3910 ; v1(2580,2150) C19.1@2628.5,2150 ; v1(2580,2210) C18.1@2628.5,2210 ; v1(2630,2100) 2630,2050 2660.59,2019.41 U4.23@2701.82,2019.41 ; v1(2760,1260) C16.1@2760,1308.5 ; U4.35@3083.71,1920.98 C14.1@3230.98,1920.98 ; C14.1@3223.5,1925 3270,1925 3310,1965 v1(3310,1990) ; R9.1@3230,1743.46 U5.4@3383.98,1743.46 ; U3.7@3247.8,3082.68 3247.8,3127.8 v1(3266.5,3146.5) C13.1@3266.5,3180 ; C10.1@3305,2806.5 v1(3305,2855) ; v1(3920,3035.59) C4.2@3920,3098.5 ; v1(3980,3035.59) C5.2@3980,3098.5 ; v2(4000,1510) 4029.63,1539.63 C9.2@4029.63,1569.63 ; v1(4060,2980) C6.2@4060,3042.91 ; C2.2@4137.27,4432.73 v1(4181.76,4388.24) ; C8.2@4142.27,1727.73 v2(4180,1690) ; C7.2@4172.27,1787.73 v2(4210,1750) ; C1.2@4182.27,4477.73 v1(4226.76,4433.24) ; C3.2@4250.37,4519.63 v1(4294.85,4475.15) ; v1(4320,2790) 4344.37,2814.37 D6.K@4344.37,2845
  Bottom w20: v1(2610,1430) J2.6@2610,1470 ; C16.1@2760,1308.5 2788.5,1308.5 2810,1330 2810,1370 2890.8,1450.8 U4.5@2890.8,1570.59 ; v1(2980,1670) 3082.72,1670 U4.43@3083.71,1669.02
  Bottom w30: J1.9@2776.69,1069.68 J1.8@2879.05,1069.68 J1.7@2973.54,1069.68 J1.6@3075.91,1069.68
  other v1: 2213,1091 3150,1100 3190,1100 3230,1100 2320,1120 2560,1120 2670,1130 2710,1130 2405,1160 2670,1170 2360,1200 2440,1200 2600,1200 3640,1200 2800,1220 2840,1220 2158,1257 2845,1275 2240,1280 2320,1280 3040,1280 3120,1280 3360,1280 2845,1330 3040,1330 2120,1360 2520,1360 3080,1360 3320,1360 3720,1360 3880,1360 2845,1390 3040,1390 2160,1440 2240,1440 2880,1440 3040,1440 3920,1440 3005,1470 2120,1520 2600,1520 3800,1520 2080,1600 4080,1600 3025,1669.02 2120,1680 2390,1690 2430,1690 2470,1690 2510,1700 2370,1730 2540,1730 3330,1743.46 3450,1745 3680,1760 2370,1780 2370,1830 2540,1830 2200,1840 3560,1840 3640,1840 2510,1860 2390,1870 2430,1870 2470,1870 2600,2000 3310,2045 2560,2080 3310,2095 2440,2160 2520,2160 3320,2160 3080,2190 3305,2235 3345,2235 3305,2275 3345,2275 3400,2320 3480,2320 2240,2400 2320,2400 3440,2400 3520,2400 3680,2400 3760,2400 1880,2480 1960,2480 2200,2480 3240,2480 3320,2480 3640,2480 3720,2480 3800,2480 3880,2480 3960,2480 1760,2560 1840,2560 2080,2560 2160,2560 2240,2560 2320,2560 2400,2560 2480,2560 2560,2560 3280,2560 3680,2560 3760,2560 3840,2560 3920,2560 4000,2560 4080,2560 1640,2640 1720,2640 1800,2640 2040,2640 2120,2640 2200,2640 2360,2640 2440,2640 2520,2640 2600,2640 3640,2640 3720,2640 3800,2640 3880,2640 3960,2640 4040,2640 4120,2640 4200,2640 1600,2720 1680,2720 1760,2720 2000,2720 2080,2720 2160,2720 2240,2720 2320,2720 2400,2720 2480,2720 2560,2720 3040,2720 3680,2720 3760,2720 3840,2720 3920,2720 4000,2720 4080,2720 4160,2720 4240,2720 3080,2800 3400,2800 3480,2800 4200,2800 4280,2800 3040,2880 3360,2880 3440,2880 3520,2880 1960,2960 2040,2960 2120,2960 2200,2960 3320,2960 3400,2960 3480,2960 3560,2960 3640,2960 3800,2960 3880,2960 3960,2960 1440,3040 2000,3040 2080,3040 2240,3040 2320,3040 2640,3040 2720,3040 3040,3040 3360,3040 3440,3040 3520,3040 3600,3040 3840,3040 2760,3120 3000,3120 3400,3120 3480,3120 3560,3120 3640,3120 3800,3120 2000,3200 2080,3200 2480,3200 2560,3200 2640,3200 2720,3200 3040,3200 3440,3200 3600,3200 3840,3200 4160,3200 1480,3280 2440,3280 2520,3280 2600,3280 2840,3280 3000,3280 3080,3280 3400,3280 3480,3280 3560,3280 3640,3280 3800,3280 3880,3280 3960,3280 4040,3280 2880,3360 2960,3360 3040,3360 3120,3360 3200,3360 3280,3360 3600,3360 3680,3360 3760,3360 3840,3360 3920,3360 4000,3360 4080,3360 4160,3360 4240,3360 4320,3360 1560,3440 2680,3440 2840,3440 2920,3440 3000,3440 3240,3440 3560,3440 3640,3440 3800,3440 3880,3440 3960,3440 4040,3440 4120,3440 4200,3440 4280,3440 1600,3520 1680,3520 2160,3520 2240,3520 2400,3520 2480,3520 2560,3520 2720,3520 2800,3520 2880,3520 2960,3520 3120,3520 3200,3520 3280,3520 3360,3520 3520,3520 3600,3520 3680,3520 3760,3520 3840,3520 3920,3520 4000,3520 4080,3520 4160,3520 4240,3520 4320,3520 1560,3600 1640,3600 1800,3600 2200,3600 2360,3600 2440,3600 2520,3600 2680,3600 2760,3600 2840,3600 3080,3600 3160,3600 3320,3600 3560,3600 3640,3600 3800,3600 3880,3600 3960,3600 4040,3600 4120,3600 4200,3600 4280,3600 1600,3680 1680,3680 1760,3680 2160,3680 2560,3680 2640,3680 2720,3680 2800,3680 2880,3680 2960,3680 3040,3680 3120,3680 3280,3680 3520,3680 3600,3680 3680,3680 3760,3680 3840,3680 3920,3680 4000,3680 4080,3680 4160,3680 4240,3680 1640,3760 1720,3760 1800,3760 2360,3760 2440,3760 2520,3760 2600,3760 2680,3760 2760,3760 2840,3760 2920,3760 3000,3760 3160,3760 3400,3760 3480,3760 3560,3760 3640,3760 3800,3760 3880,3760 3960,3760 4040,3760 4120,3760 4200,3760 1760,3840 2240,3840 2400,3840 2480,3840 2560,3840 2640,3840 2720,3840 2800,3840 2880,3840 2960,3840 3120,3840 3360,3840 3440,3840 3520,3840 3600,3840 3680,3840 3760,3840 3840,3840 3920,3840 4000,3840 4080,3840 4160,3840 1720,3920 1800,3920 2040,3920 2360,3920 2440,3920 2520,3920 2600,3920 2680,3920 2760,3920 2840,3920 3000,3920 3240,3920 3320,3920 3400,3920 3480,3920 3560,3920 3640,3920 3800,3920 3880,3920 3960,3920 4040,3920 4120,3920 1680,4000 1760,4000 1840,4000 1920,4000 2160,4000 2240,4000 2400,4000 2480,4000 2560,4000 2640,4000 2720,4000 3200,4000 3280,4000 3360,4000 3440,4000 3520,4000 3600,4000 3680,4000 3760,4000 3920,4000 4000,4000 4080,4000 4160,4000 1640,4080 1720,4080 1800,4080 1880,4080 1960,4080 2040,4080 2120,4080 2200,4080 2360,4080 2440,4080 2520,4080 2600,4080 2840,4080 3080,4080 3160,4080 3240,4080 3320,4080 3400,4080 3480,4080 3560,4080 3640,4080 3720,4080 3800,4080 3960,4080 4040,4080 4120,4080 4200,4080 1600,4160 1680,4160 1760,4160 1840,4160 1920,4160 2000,4160 2080,4160 2240,4160 2320,4160 2800,4160 3120,4160 3200,4160 3280,4160 3360,4160 3600,4160 3680,4160 3760,4160 3840,4160 3920,4160 4080,4160 4160,4160 4240,4160 3325,4175 3550,4175 1560,4240 1640,4240 1720,4240 1880,4240 1960,4240 2040,4240 2120,4240 2200,4240 2280,4240 2360,4240 2680,4240 2760,4240 3080,4240 3160,4240 3240,4240 3640,4240 3720,4240 3800,4240 3880,4240 3960,4240 4120,4240 4200,4240 4280,4240 3325,4250 3550,4250 1600,4320 1680,4320 4080,4320 4160,4320 4240,4320 1560,4400 1640,4400 1800,4400 1880,4400 1960,4400 2040,4400 2120,4400 3720,4400 3800,4400 3880,4400 3960,4400 4280,4400 1520,4480 1920,4480 2000,4480 3840,4480 3920,4480 4000,4480 1800,4560 1880,4560 3960,4560 4040,4560 1680,4640 1760,4640 4080,4640
  other v2: 3215,2985 3255,2985 3215,3015 3255,3015 1695,3225 1735,3225
IND_N: J1.2 R8.1 | length 123.9
  Bottom w18: J1.2@2951.89,1175 2951.89,1210.57 2951.09,1211.37 2951.09,1247.91 2968,1264.82 R8.1@2968,1291.54
IND_P: J1.3 R15.1 | length 124.4
  Bottom w18: R15.1@2909,1291.54 2909,1264.82 2927.09,1246.72 2927.09,1211.37 2926.3,1210.57 J1.3@2926.3,1175
INT1_XM: TP21.1 U4.20 U7.13 | length 2668.3
  Top w10: v2(1640,3455) 1640,3405 1840,3205 1840,2700 2250,2290 v1(2250,2170)
  Bottom w10: v2(1640,3455) 1675.79,3419.21 U7.13@1675.79,3395.94 ; TP21.1@2225,1775 2230,1780 2230,2150 v1(2250,2170) 2320,2170 2350,2140 2350,2115 2310,2075 2310,1980 2335,1955 2523,1955 2588.51,1889.49 U4.20@2634.89,1889.49
INT2_XM: TP19.1 U4.26 U7.14 | length 2930
  Top w10: v2(1685,3460) 1685,3390 1870,3205 v1(1870,2895)
  Bottom w10: TP19.1@1535,3015 1605,3015 1625,2995 1625,2925 1655,2895 v1(1870,2895) 2665,2895 2880,2680 2880,2180 2796.31,2096.31 U4.26@2796.31,2019.41 ; v2(1685,3460) 1695.47,3449.53 U7.14@1695.47,3395.94
INT_G: U7.11
LED_DATA: TP22.1 U2.2 U4.27 | length 2672.9
  Bottom w10: TP22.1@1535,3105 1620,3105 1645,3080 1645,2940 1670,2915 1841.63,2915 1855,2928.37 1886.63,2928.37 1900,2915 2217.42,2915 2257.42,2955 2565,2955 2600,2990 2600,3075 2620,3095 U2.2@2645.35,3095 2740,3095 2900,2935 2900,2170 2827.8,2097.8 U4.27@2827.8,2019.41
MISO: J2.1 U4.11 | length 510.1
  Bottom w10: J2.1@2410,1270 2450,1270 2490,1310 2490,1370 2510,1390 2510,1490 2590.59,1570.59 U4.11@2701.82,1570.59
MOSI: J2.4 U4.10 | length 275.1
  Bottom w10: J2.4@2610,1370 2650,1370 2690,1410 2690,1460 2733.31,1503.31 U4.10@2733.31,1570.59
NC1: U7.1
NC10: U7.10
NC12: U7.12
NetBAT1_1: BAT1.1 BAT2.2 | length 1458.4
  Bottom w60: BAT2.2@2440,4190 2625,4190 2795,4020 3055,4020 3440,3635 BAT1.1@3440,3406.54
NetBAT2_1: BAT2.1 D8.A | length 1233
  Bottom w60: BAT2.1@2440,3406.54 2623.46,3406.54 2950,3080 D8.A@2950,2492.26
NetC10_2: C10.2 R5.1 | length 58
  Bottom w15: R5.1@3246.97,2743.5 C10.2@3305,2743.5
NetC11_1: C11.1 MIC1.4 | length 305.9
  Top w15: v4(3658,1367) MIC1.4@3658,1417
  Bottom w10: v4(3658,1367) 3720,1429 3720,1538.5 C11.1@3678.5,1580
NetC11_2: C11.2 R13.1 | length 55
  Bottom w10: C11.2@3741.5,1580 R13.1@3741.5,1635.04
NetC12_2: C12.2 R6.1 | length 84.9
  Bottom w10: C12.2@3125,2801.54 R6.1@3185,2741.54